# EAGLE board Large_G2iM+_kit (EAGLE 5.06)
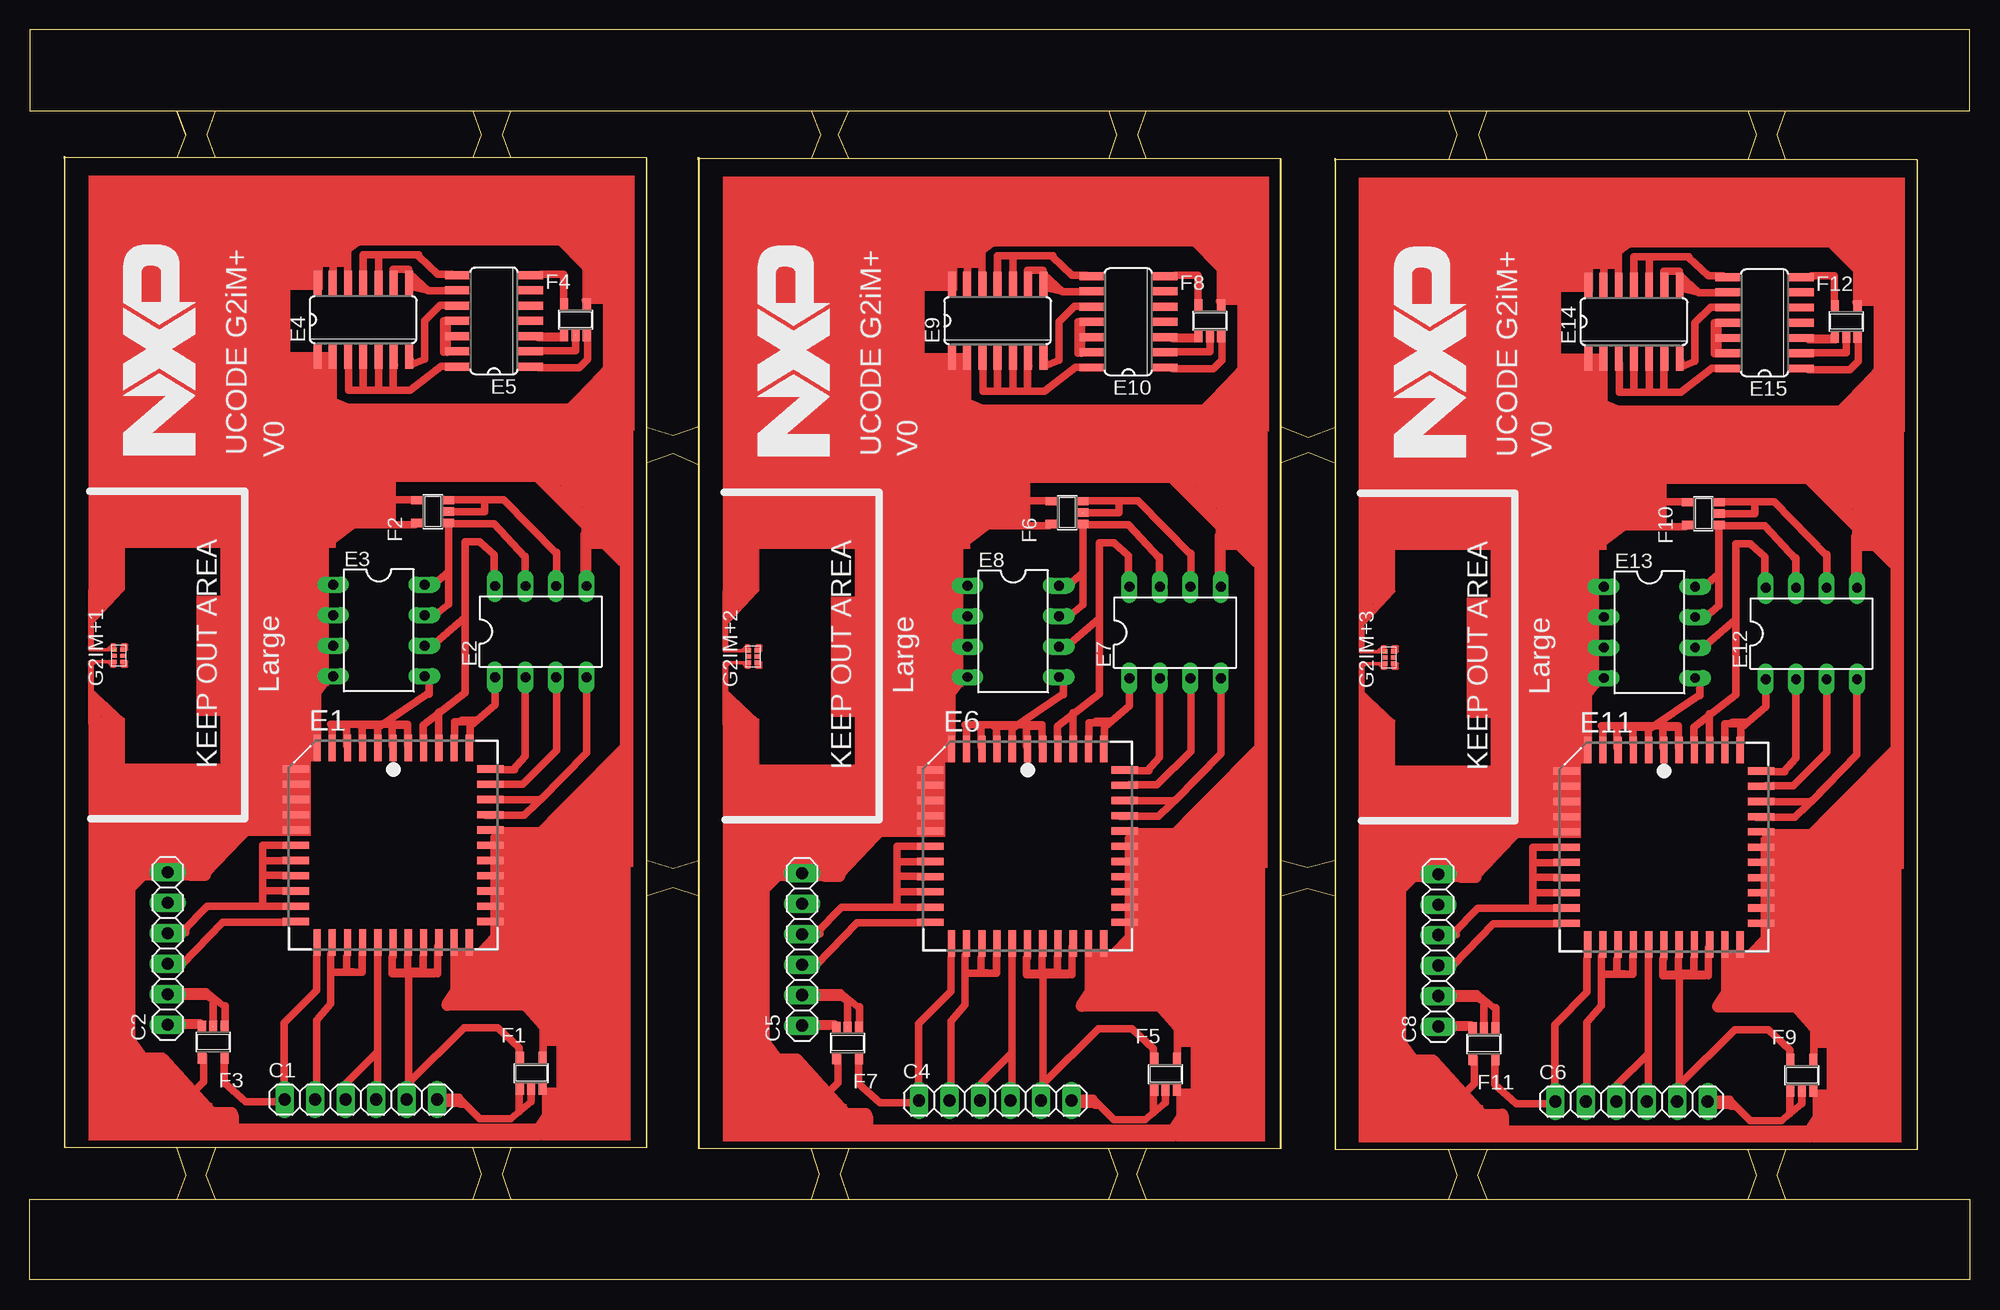
[diagram p0: board, top side]
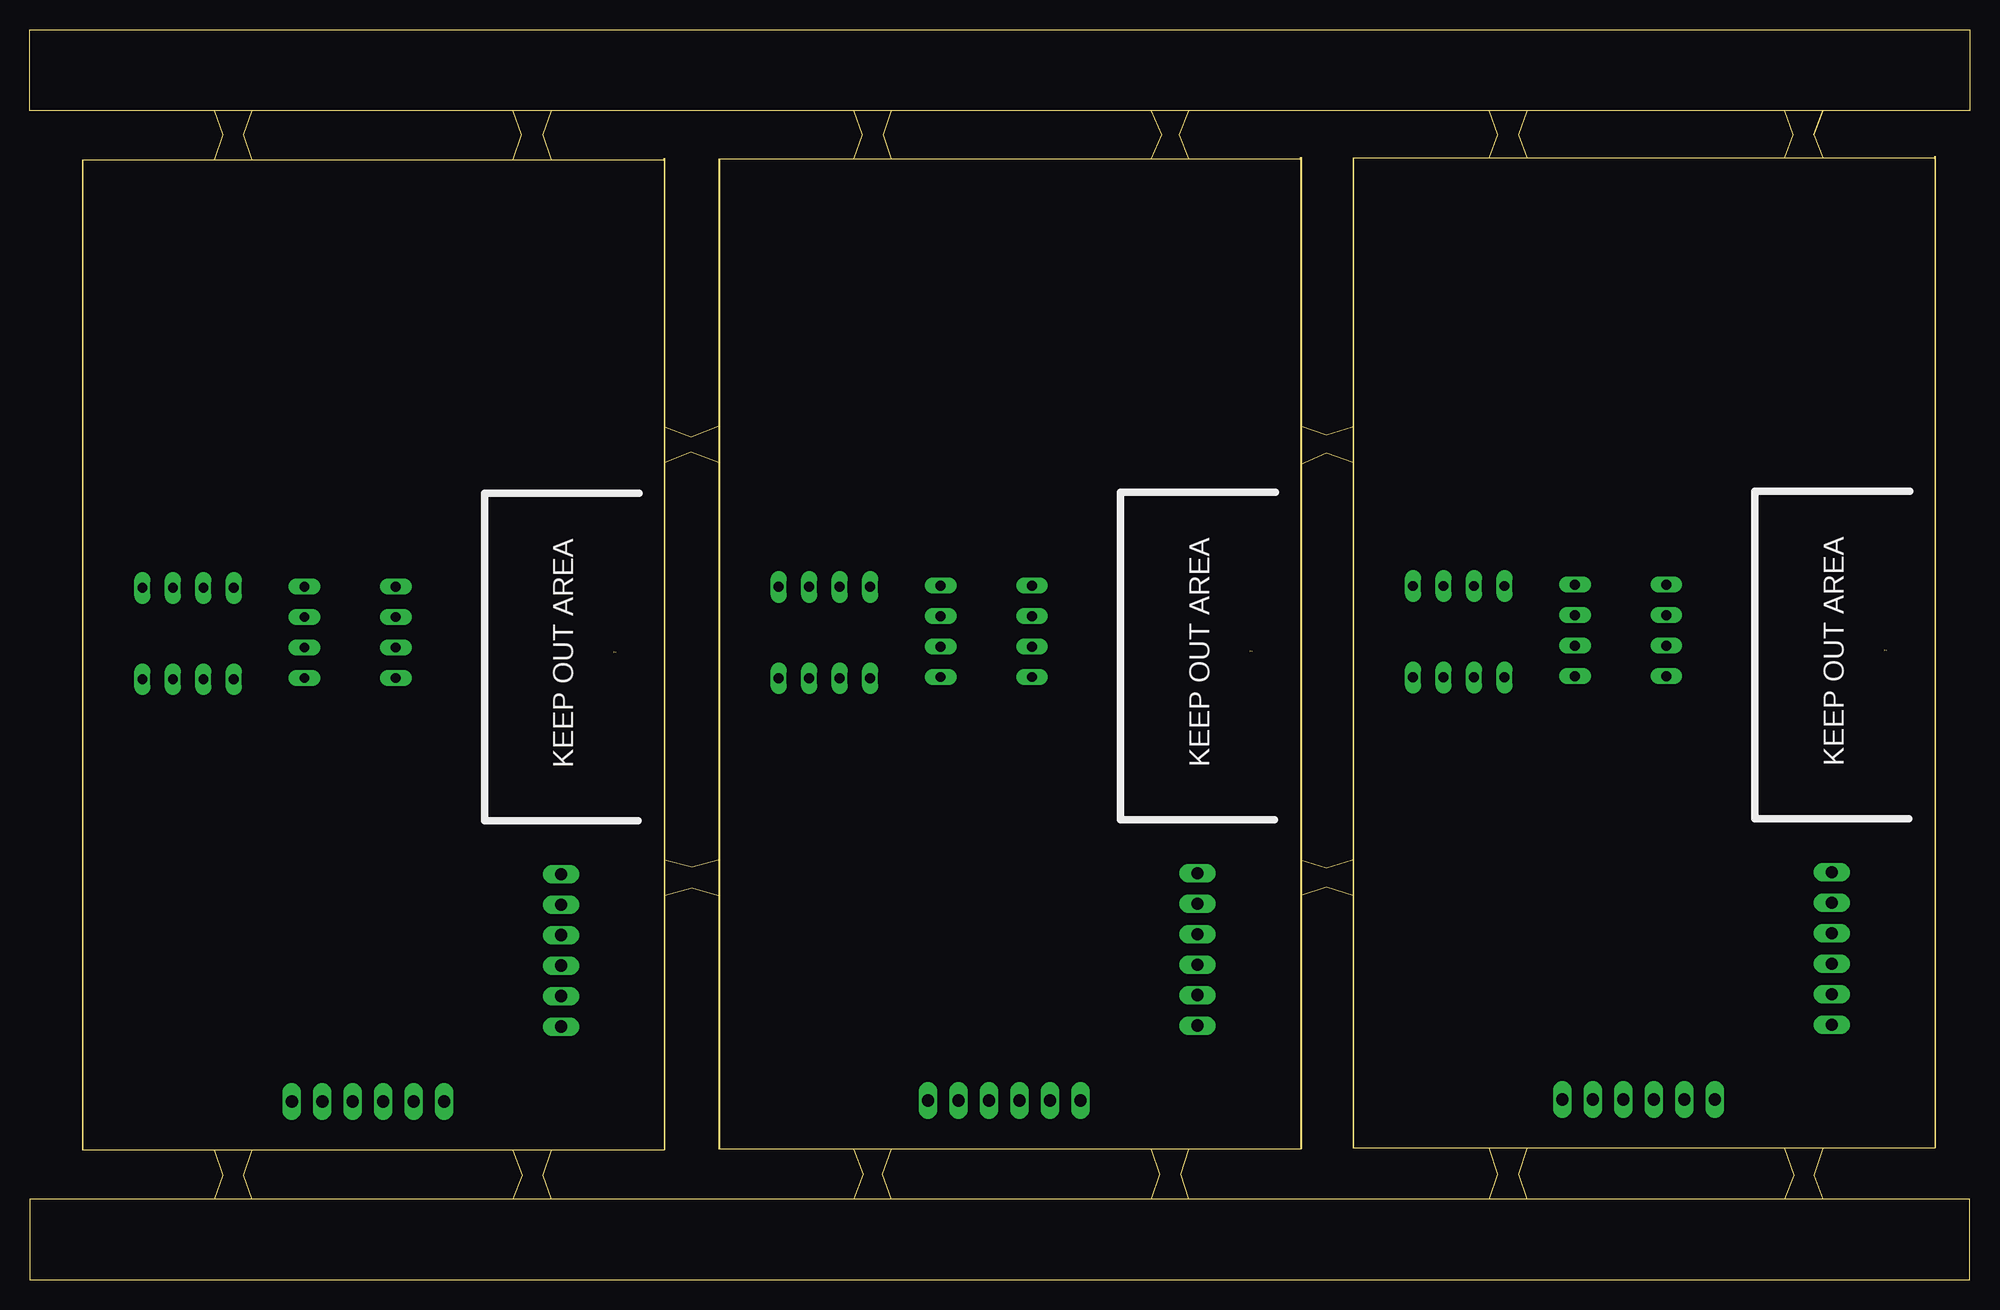
[diagram p1: board, bottom side, seen from below]

Size 161.68 x 104.16 mm. Coordinates in mm from the lower left corner, seen from the top.
Outline: 156 segments
Copper layers (1*16): Top 0.035mm / dielectric 1.5mm / Bottom 0.035mm
Design rules "default *": minimum track width 10mil, minimum drill 24mil, track to track 0mil, track to pad 0mil, pad to pad 0mil, via to via 8mil, smd to smd 0mil, copper to edge 40mil, drill to drill 8mil, minimum pad ring 10mil, minimum via ring 8mil, stop-mask expansion 0mil, vias tented up to drill 0mil, thermal gap 10mil

## Footprints (pad centres in the part's own frame; a part is rotated, then mirrored left to right if it is on the bottom)
1X06 = drill 1.016 long: 1 -6.35,0; 2 -3.81,0; 3 -1.27,0; 4 1.27,0; 5 3.81,0; 6 6.35,0
PLCC44 = smd 0.6 x 2.2: 1 0,8.1; 2 -1.27,8.1; 3 -2.54,8.1; 4 -3.81,8.1; 5 -5.08,8.1; 6 -6.35,8.1; 18 -6.35,-8.1; 19 -5.08,-8.1; 20 -3.81,-8.1; 21 -2.54,-8.1; 22 -1.27,-8.1; 23 0,-8.1; 24 1.27,-8.1; 25 2.54,-8.1; 26 3.81,-8.1; 27 5.08,-8.1; 28 6.35,-8.1; 40 6.35,8.1; 41 5.08,8.1; 42 3.81,8.1; 43 2.54,8.1; 44 1.27,8.1 | smd 2.2 x 0.6: 7 -8.1,6.35; 8 -8.1,5.08; 9 -8.1,3.81; 10 -8.1,2.54; 11 -8.1,1.27; 12 -8.1,0; 13 -8.1,-1.27; 14 -8.1,-2.54; 15 -8.1,-3.81; 16 -8.1,-5.08; 17 -8.1,-6.35; 29 8.1,-6.35; 30 8.1,-5.08; 31 8.1,-3.81; 32 8.1,-2.54; 33 8.1,-1.27; 34 8.1,0; 35 8.1,1.27; 36 8.1,2.54; 37 8.1,3.81; 38 8.1,5.08; 39 8.1,6.35
DIL08 = drill 0.813 long: 1 -3.81,-3.81; 2 -1.27,-3.81; 3 1.27,-3.81; 4 3.81,-3.81; 5 3.81,3.81; 6 1.27,3.81; 7 -1.27,3.81; 8 -3.81,3.81
SO14 = smd 0.66 x 2.032: 1 -3.81,-3.073; 2 -2.54,-3.073; 3 -1.27,-3.073; 4 0,-3.073; 5 1.27,-3.073; 6 2.54,-3.073; 7 3.81,-3.073; 8 3.81,3.073; 9 2.54,3.073; 10 1.27,3.073; 11 0,3.073; 12 -1.27,3.073; 13 -2.54,3.073; 14 -3.81,3.073
SOT23-5 = smd 0.69 x 0.99: 1 -0.95,-1.29; 2 0,-1.29; 3 0.95,-1.29; 4 0.95,1.3; 5 -0.95,1.3
SOT886 = smd 0.35 x 0.4: 1 0.5,0.338; 2 0,0.338; 3 -0.5,0.338; 4 -0.5,-0.338; 5 0,-0.338; 6 0.5,-0.338

## Placement (x,y rotation side)
C1  [1X06]  27.58,15.02 0 top
C2  [1X06]  11.48,27.62 90 top
C4  [1X06]  80.46,14.94 0 top
C5  [1X06]  64.36,27.54 90 top
C6  [1X06]  133.5,14.86 0 top
C8  [1X06]  117.4,27.46 90 top
E1  [PLCC44]  30.28,36.22 0 top
E2  [DIL08]  42.58,54.02 0 top
E3  [DIL08]  29.08,54.12 270 top
E4  [SO14]  27.78,80.02 0 top
E5  [SO14]  38.68,79.92 90 top
E6  [PLCC44]  83.16,36.14 0 top
E7  [DIL08]  95.46,53.94 0 top
E8  [DIL08]  81.96,54.04 270 top
E9  [SO14]  80.66,79.94 0 top
E10  [SO14]  91.56,79.84 90 top
E11  [PLCC44]  136.2,36.06 0 top
E12  [DIL08]  148.5,53.86 0 top
E13  [DIL08]  135,53.96 270 top
E14  [SO14]  133.7,79.86 0 top
E15  [SO14]  144.6,79.76 90 top
E$1  [LOGO]  13.78,68.72 90 top
E$3  [LOGO]  66.66,68.64 90 top
E$4  [LOGO]  119.7,68.56 90 top
F1  [SOT23-5]  41.78,17.22 0 top
F2  [SOT23-5]  33.58,64.02 90 top
F3  [SOT23-5]  15.28,19.82 180 top
F4  [SOT23-5]  45.48,80.02 0 top
F5  [SOT23-5]  94.66,17.14 0 top
F6  [SOT23-5]  86.46,63.94 90 top
F7  [SOT23-5]  68.16,19.74 180 top
F8  [SOT23-5]  98.36,79.94 0 top
F9  [SOT23-5]  147.7,17.06 0 top
F10  [SOT23-5]  139.5,63.86 90 top
F11  [SOT23-5]  121.2,19.66 180 top
F12  [SOT23-5]  151.4,79.86 0 top
G2IM+1  [SOT886]  7.38,52.02 90 top
G2IM+2  [SOT886]  60.26,51.94 90 top
G2IM+3  [SOT886]  113.3,51.86 90 top

## Library data of the parts
C1 C2 C4-C6 C8 = pinhead
E1 E6 E11 = altera
E2 E3 E7 E8 E12 E13 = ic-package
E4 E5 E9 E10 E14 E15 = 74xx-eu
E$1 E$3 E$4 G2IM+1-G2IM+3 = NXP_1
F1-F12 = 74xx-little-us

## Tracks (layer width: path | path; a pad name or v marks a point on that pad's centre or on a via)
S$107
  Top 1.422: 12.28,73.72 12.18,73.72
S$108
  Top 1.422: 21.88,83.82 12.18,74.32 16.28,76.92 17.08,74.92
S$109
  Top 1.422: 17.78,79.42 17.88,79.42 17.88,74.12 16.88,74.12 16.88,78.22 16.28,78.22 16.28,74.32 15.18,74.32 15.18,75.42 14.28,75.42 14.28,74.32
S$110
  Top 1.27: 13.18,71.72 13.78,71.72 13.78,72.12
S$114
  Top 0.61: 41.38,50.12 41.28,50.12 41.28,43.82
S$117
  Top 0.61: 46.48,58.42 46.48,63.42 | 46.48,63.42 46.48,63.62 | 46.48,63.42 46.48,68.92
S$124
  Top 0.61: 46.18,62.12 46.18,58.12
S$125
  Top 0.61: 43.88,49.92 43.88,44.22
S$126
  Top 0.61: 46.38,49.92 46.38,43.92
S$127
  Top 0.61: 42.78,18.52 42.78,24.62
S$170
  Top 0.61: 42.78,15.72 47.98,15.72 47.98,15.82
S$171
  Top 0.61: 48.68,37.12 48.98,37.12 | 48.98,37.12 49.48,37.12 | 48.98,37.12 48.98,35.52
  Top 1.27: 48.68,37.12 48.88,37.12 48.88,42.42 48.18,42.42 48.18,37.02 47.68,37.02 47.68,40.72 46.88,40.72 46.88,37.32 45.98,37.32 45.98,39.52 45.48,39.52 45.48,37.32 44.48,37.32 44.48,38.02
S$172
  Top 0.61: 43.68,29.52 43.68,29.62
S$173
  Top 0.61: 41.68,30.82 44.18,30.82
  Top 1.27: 36.48,25.82 42.78,32.62 42.78,25.32 41.68,25.32 41.68,30.82
S$174
  Top 0.61: 43.88,31.92 43.88,32.12
S$175
  Top 0.61: 43.48,33.12 43.48,33.22
S$176
  Top 0.61: 43.48,34.42 43.48,34.52
S$177
  Top 0.61: 41.78,15.82 41.78,14.82 40.08,13.42
S$178
  Top 0.61: 40.78,15.62 40.78,14.02
S$179
  Top 0.61: 31.48,15.02 31.48,16.12 31.58,16.12 31.58,25.72 | 31.48,27.02 31.48,25.72 31.58,25.72 | 31.58,25.72 32.78,25.72 32.78,27.02
S$180
  Top 0.61: 31.58,16.42 36.18,21.02
S$181
  Top 0.61: 40.78,18.52 40.78,19.22
S$182
  Top 0.61: 40.78,19.32 38.98,21.02 36.18,21.02
S$183
  Top 0.61: 28.88,15.02 28.98,15.02 28.98,28.32
S$184
  Top 0.61: 34.98,65.02 37.88,65.02 | 37.88,65.02 39.48,65.02 43.88,60.52 | 34.88,64.02 37.88,64.02 37.88,65.02
S$185
  Top 0.61: 43.88,60.62 43.88,58.82
S$186
  Top 0.61: 34.88,63.02 38.68,63.02 41.28,60.22
S$187
  Top 0.61: 41.18,60.32 41.28,60.32 41.28,58.52
S$188
  Top 0.61: 26.38,15.02 26.38,16.42 28.98,19.02 28.98,17.72
S$189
  Top 0.61: 26.38,26.92 26.38,25.62 25.08,25.62 25.08,25.72 | 25.08,25.72 25.08,27.12 | 25.08,25.72 25.08,23.02 23.88,21.62
S$190
  Top 0.61: 32.28,65.02 29.88,65.02 27.68,66.62
S$191
  Top 0.61: 27.58,66.72 27.58,69.92
S$192
  Top 0.61: 30.28,26.92 30.18,26.92 30.18,25.52
S$193
  Top 0.61: 30.18,25.72 30.18,25.62 33.98,25.52 33.98,27.82
S$194
  Top 0.61: 16.78,42.32 17.18,42.32 17.18,40.92 | 16.78,42.32 15.08,42.32 15.08,42.22 | 17.18,40.92 17.18,41.12 | 17.18,40.92 17.18,39.72 | 16.78,42.32 16.78,39.72 16.38,39.72 | 16.38,39.72 15.88,39.72 | 16.38,39.72 16.38,42.12
S$195
  Top 0.61: 15.08,38.42 15.08,38.52
S$196
  Top 0.61: 15.38,37.12 15.38,37.22
S$197
  Top 0.61: 9.98,34.12 10.88,34.12 11.78,34.62
S$198
  Top 0.61: 16.18,18.32 16.18,16.42
S$199
  Top 0.61: 16.18,16.42 17.98,14.82
S$200
  Top 0.61: 21.38,14.82 17.98,14.82
S$201
  Top 0.61: 14.38,18.72 14.48,18.72 14.48,16.52 12.78,14.82 5.98,14.82 5.98,14.92
S$202
  Top 0.61: 8.18,21.32 6.08,21.32
S$203
  Top 0.61: 12.28,26.32 12.68,26.32 16.08,29.82 16.48,29.82 21.38,29.82
S$204
  Top 0.61: 14.18,21.42 12.38,21.42
S$205
  Top 0.61: 16.28,22.72 16.28,21.42 | 16.28,22.72 16.28,22.82 | 14.68,24.02 16.28,22.72
S$206
  Top 0.61: 15.28,21.32 15.28,23.12
S$207
  Top 0.61: 21.38,31.12 14.78,31.12 12.68,29.02
S$208
  Top 0.61: 12.28,28.92 12.98,28.92
S$209
  Top 0.61: 25.28,61.62 26.98,62.92 32.08,62.92 32.08,63.12
S$210
  Top 0.61: 20.28,61.42 22.78,61.42 22.78,62.82 | 20.28,61.42 17.68,61.42 17.68,62.82 17.58,62.82 | 20.28,61.42 20.28,63.92
S$211
  Top 0.61: 38.68,58.82 38.68,60.42 37.58,61.42
S$212
  Top 0.61: 31.48,25.62 30.28,25.62
S$213
  Top 0.61: 33.78,25.62 31.58,25.62 31.58,25.52 | 31.58,25.52 30.38,25.52 | 31.58,25.52 33.68,25.52
S$214
  Top 0.61: 32.78,44.92 32.78,46.22 36.28,48.92 36.28,60.22
S$215
  Top 0.61: 31.48,46.12 31.48,46.22 30.18,46.22 30.18,44.52 | 31.48,46.12 31.48,44.52 | 25.08,46.32 31.48,46.32 31.48,46.12
S$216
  Top 1.27: 41.58,36.02 49.68,44.22
S$217
  Top 1.27: 38.68,23.22 36.48,23.22 36.48,25.82 38.58,25.82 38.58,25.62 38.28,25.62 38.28,23.82 37.58,23.82 37.58,24.82
S$218
  Top 1.27: 49.48,60.02 39.78,69.72 39.78,69.62 39.98,69.62
S$219
  Top 1.27: 45.38,69.52 45.78,69.52 45.78,65.02 44.98,65.02 44.98,66.12 44.88,66.12 44.88,68.82 42.68,68.82 42.68,68.42 44.08,68.42 44.08,67.42 44.18,67.42 44.18,66.82 43.48,66.82 43.48,67.52
S$220
  Top 1.27: 42.58,69.52 42.48,69.52 42.48,67.42 42.18,67.42 42.18,68.92
S$221
  Top 1.27: 15.88,62.92 15.68,62.92
S$222
  Top 1.27: 40.38,26.72 37.78,26.72 37.78,26.52
S$223
  Top 1.27: 14.58,14.02 9.78,14.02 9.78,14.12 14.98,13.92 10.98,18.32
S$224
  Top 1.27: 11.88,15.72 12.88,15.72 12.88,14.12
S$225
  Top 0.61: 10.18,62.52 14.28,62.52 14.28,61.82
S$226
  Top 0.61: 13.08,29.32 12.28,28.92
S$227
  Top 0.61: 12.28,26.32 12.88,26.62
S$228
  Top 0.61: 12.48,23.62 14.98,23.62 14.98,23.52
S$229
  Top 0.61: 12.28,21.22 13.78,21.22
S$230
  Top 0.61: 6.08,21.02 8.18,21.02 8.18,21.52 6.38,21.52
S$231
  Top 0.61: 20.98,15.12 21.18,15.12 21.18,16.22
S$232
  Top 0.61: 22.58,61.82 18.08,61.82
S$233
  Top 0.61: 22.48,62.32 17.98,62.32
S$234
  Top 0.61: 17.98,62.42 14.38,62.42 14.38,62.32
S$235
  Top 0.61: 22.68,62.42 25.98,62.42 25.98,62.32
S$236
  Top 1.016: 40.68,23.62 43.68,20.22 45.98,19.72
S$237
  Top 1.016: 46.88,22.42 42.48,22.42 42.48,22.52
S$238
  Top 1.016: 20.18,85.02 20.18,87.02 21.48,87.02 18.88,83.52 | 18.88,83.52 18.88,80.82 | 18.88,83.52 12.08,76.72 12.08,77.82 18.88,77.82
S$239
  Top 1.016: 19.48,84.12 19.58,84.12 19.58,82.62 20.28,82.62 20.28,84.22
S$240
  Top 0.61: 25.28,84.02 25.28,84.72 26.48,84.72 26.48,83.82
S$241
  Top 0.61: 35.18,83.82 33.98,83.82 32.38,85.32
S$242
  Top 0.61: 32.38,85.42 27.78,85.42 27.78,83.82
S$243
  Top 0.61: 29.08,85.32 29.08,83.32
S$244
  Top 0.61: 35.28,82.42 33.38,82.42 | 33.38,82.42 33.18,82.42 31.58,83.92 31.58,82.82 33.38,82.42
S$245
  Top 0.61: 31.98,83.32 32.08,83.32 32.08,82.92
S$246
  Top 0.61: 31.58,84.02 31.58,84.22 30.28,84.22 30.28,83.92
S$247
  Top 0.61: 44.58,81.62 44.48,81.62 44.48,83.82 42.58,83.82 42.58,83.72
S$248
  Top 0.61: 46.28,81.62 47.88,81.62
S$249
  Top 0.61: 44.58,78.52 42.38,78.52 42.38,78.62 44.28,78.62
S$250
  Top 0.61: 42.38,77.42 45.48,77.42 45.48,78.82
S$251
  Top 0.61: 42.38,76.02 45.78,76.02 46.48,76.72 46.48,78.62
S$252
  Top 0.61: 35.18,81.22 34.18,81.22 32.88,79.92 32.88,76.92
S$253
  Top 0.61: 32.88,76.72 31.68,76.22 31.68,76.72
S$254
  Top 0.61: 34.78,79.92 34.78,77.32
S$255
  Top 0.61: 34.48,79.92 34.48,77.32
S$256
  Top 0.61: 34.98,76.12 34.28,76.12 31.68,74.12 30.28,74.12 | 30.28,74.12 26.58,74.12 26.58,76.52 | 30.38,76.22 30.28,76.22 30.28,74.12
S$257
  Top 0.61: 27.78,76.32 27.78,74.42
S$258
  Top 0.61: 29.08,76.22 29.08,74.22
S$259
  Top 1.016: 44.48,71.92 46.98,74.52 48.98,76.62
S$260
  Top 1.016: 47.68,72.42 47.68,74.32 47.18,74.32 47.18,72.42 46.58,72.42 46.58,73.02
S$261
  Top 1.016: 48.28,78.22 48.28,82.62 42.38,88.62
S$262
  Top 1.016: 45.88,86.72 45.88,85.62
S$263
  Top 1.016: 25.78,85.52 25.68,85.52 27.18,86.62 29.18,87.02
S$264
  Top 1.016: 23.98,74.52 24.08,74.52 24.08,71.42 22.88,71.42 22.88,74.02 29.28,71.42
S$265
  Top 0.61: 23.78,14.92 23.88,14.92 23.88,21.52
S$266
  Top 0.61: 27.68,25.62 27.68,27.22 | 27.68,25.62 26.38,25.72 | 26.48,25.62 27.68,25.62
S$267
  Top 0.61: 23.88,25.32 23.88,26.92 | 23.88,25.32 23.88,24.82 | 23.88,24.22 23.88,25.32
S$268
  Top 0.61: 21.28,21.52 23.88,24.12
S$269
  Top 0.61: 40.08,13.42 37.48,13.42 35.78,15.12
S$270
  Top 0.61: 35.78,15.22 33.98,15.22 33.98,14.72 35.58,14.72 35.58,14.82 35.88,14.82 35.88,14.62 36.08,14.62
S$271
  Top 0.61: 20.78,86.62 20.98,86.62 20.98,83.42 18.68,83.42 18.68,80.92 18.28,80.92 18.28,82.02 17.98,82.02 17.98,80.82 17.58,80.82 17.58,81.32 17.28,81.32 17.28,79.92 16.88,79.92 16.88,80.72 16.48,80.72 16.48,78.92 16.18,78.92 | 15.28,78.92 16.18,78.92 | 16.18,78.92 16.18,79.72 15.68,79.72 15.68,79.22
S$272
  Top 0.254: 15.28,79.42 15.38,79.42 15.38,79.02
S$273
  Top 0.254: 16.18,80.22 16.18,79.92
S$274
  Top 0.254: 5.98,48.22 5.98,47.62 5.78,47.62 5.78,46.82 | 5.18,49.02 5.18,46.82 5.38,46.82 5.38,48.82 5.58,48.72 5.58,46.82 5.78,46.82 | 5.78,46.82 5.78,48.42 5.88,48.22 5.98,47.02 7.28,47.02 | 7.38,47.02 7.28,47.02 | 7.28,47.02 6.18,47.12 6.18,48.12 6.38,48.02 6.38,47.22 6.58,47.22 | 7.18,47.22 6.68,47.22 | 6.68,47.22 6.58,47.22 | 6.58,47.22 6.58,47.72 | 6.68,47.62 6.68,47.22 | 6.68,47.22 6.98,47.22 6.98,47.42 6.78,47.42 6.78,47.52 | 5.78,46.82 7.48,46.82
S$275
  Top 0.254: 5.18,57.32 5.08,57.32 5.08,54.82 5.28,55.02 5.28,57.22 7.28,57.22 | 7.48,57.22 7.28,57.22 | 7.28,57.22 7.28,57.02 5.48,57.02 5.48,55.22 5.68,55.42 5.68,56.82 6.88,56.82 | 7.08,56.82 6.88,56.82 | 6.88,56.82 6.88,56.62 5.88,56.62 5.88,55.62 6.08,56.02 6.08,56.42 6.28,56.42 | 6.68,56.42 6.28,56.42 | 6.28,56.42 6.28,56.02 6.48,56.52
S$276
  Top 0.61: 34.08,44.82 34.08,47.32
S$277
  Top 0.61: 37.48,61.52 36.28,61.52 36.28,60.32
S$278
  Top 0.61: 35.38,45.22 35.38,46.52 36.68,46.52 36.68,45.02
S$279
  Top 0.61: 38.78,49.62 38.78,47.92 36.68,46.12
S$280
  Top 0.61: 23.88,44.92 23.98,44.92 23.98,48.92 | 23.98,48.92 23.98,53.12 23.68,53.12 23.68,45.42 | 23.98,48.92 24.58,49.72
S$281
  Top 0.61: 21.18,16.32 21.18,21.42
S$282
  Top 0.61: 34.88,59.12 34.88,59.02 33.28,57.62 | 34.88,59.12 34.88,63.12 | 34.88,59.12 34.88,56.32 33.28,55.02
S$283
  Top 0.61: 21.78,36.22 19.38,36.22 19.38,31.22
S$284
  Top 0.61: 19.58,32.42 21.48,32.42
S$285
  Top 0.61: 19.68,33.72 21.38,33.72
S$286
  Top 0.61: 19.48,34.92 21.48,34.92
S$287
  Top 0.61: 40.28,42.52 39.18,42.52 | 40.28,42.52 40.38,42.52 | 40.28,42.52 41.28,43.62
S$288
  Top 0.61: 38.78,41.32 41.08,41.32 43.88,44.12
S$289
  Top 0.61: 38.58,40.02 42.58,40.02 46.38,43.92
S$290
  Top 0.61: 14.58,24.02 12.38,24.02 12.38,23.92
S$291
  Top 0.61: 37.98,38.72 41.08,38.72
S$292
  Top 0.61: 41.18,38.72 43.28,40.72
S$293
  Top 1.016: 13.38,33.72 14.58,33.72 14.58,33.92 18.28,37.82
S$294
  Top 1.016: 14.18,34.92 14.58,34.92
S$295
  Top 1.016: 15.08,36.92 16.48,36.92
S$296
  Top 1.016: 14.28,13.92 16.78,13.92 16.78,13.72 16.88,13.72 16.88,12.62
S$297
  Top 1.016: 43.78,12.12 42.18,12.12 43.08,13.52 43.08,12.72 45.18,12.62
S$298
  Top 1.016: 41.88,22.92 34.78,22.92 36.78,26.02 36.78,24.02 37.38,23.92
S$299
  Top 0.61: 33.28,48.92 33.28,50.22 | 28.98,46.02 28.98,44.82 | 28.98,46.02 28.98,46.22 27.48,46.22 27.48,46.32 | 27.68,44.82 27.68,46.32 27.48,46.32 | 26.38,46.32 27.48,46.32 | 26.38,46.32 25.18,46.32 25.18,44.32 | 26.38,46.32 26.38,44.52 | 33.28,48.92 33.28,48.82 | 28.98,46.02 33.28,48.92
S$300
  Top 0.61: 33.28,52.62 36.28,55.22
S$301
  Top 0.61: 24.08,52.02 24.58,52.92 24.28,52.22
S$302
  Top 0.61: 23.68,53.22 24.58,53.22 24.58,53.12
S$303
  Top 0.61: 35.98,46.62 37.08,46.62
S$304
  Top 0.61: 7.88,32.02 9.88,34.02
S$305
  Top 0.61: 9.58,18.52 7.98,20.72
S$306
  Top 0.61: 8.78,18.32 8.88,18.32 8.88,19.32
S$307
  Top 0.305: 24.78,55.42 24.68,55.42 24.68,58.22 24.48,58.22 | 24.48,58.22 24.48,55.42 24.18,55.42 24.18,58.22 24.48,58.22
S$308
  Top 0.254: 4.98,57.52 4.98,55.32 4.98,54.52 | 4.98,54.52 7.78,57.52 | 4.98,52.52 4.98,54.52 | 5.38,52.52 5.08,52.92
  Top 0.305: 6.98,52.52 6.28,52.52 5.38,52.52 4.98,52.52 4.98,55.32
S$309
  Top 0.254: 5.38,51.42 4.98,51.12
S$310
  Top 0.254: 5.18,54.62 5.18,52.82
S$311
  Top 0.254: 5.18,51.22 5.18,49.12
S$312
  Top 0.254: 6.38,52.52 6.78,52.82 | 6.78,52.72 7.08,52.72
  Top 0.305: 6.78,52.82 6.78,52.72 6.78,52.62
S$313
  Top 0.254: 7.08,52.62 7.08,52.92 6.78,52.92
S$314
  Top 0.254: 6.48,51.52 6.78,51.22 7.08,51.22 7.08,51.32 | 4.98,49.32 4.98,51.52 | 4.98,49.32 7.78,46.72 | 4.98,49.32 4.98,49.02 4.98,46.32 | 7.08,51.32 7.08,51.42 | 6.78,51.42 6.78,51.12 7.08,51.12 7.08,51.32
  Top 0.305: 6.78,51.52 6.98,51.52 | 6.78,51.52 6.78,51.42 6.78,51.22 | 6.78,51.52 6.88,51.52 | 6.78,51.52 6.48,51.52 6.38,51.52 4.98,51.52 4.98,49.02
S$315
  Top 0.254: 7.78,52.92 7.88,52.92 7.88,52.72
S$316
  Top 0.254: 7.68,52.52 7.68,52.92 8.08,52.92 8.08,52.52 7.68,52.52
  Top 0.305: 7.68,52.52 7.88,52.52
S$317
  Top 0.254: 7.68,51.42 7.68,51.22
  Top 0.305: 7.68,51.42 7.88,51.42
S$318
  Top 0.254: 7.68,51.52 7.68,51.12 8.08,51.12 8.08,51.52 7.88,51.52 7.88,51.32
S$319
  Top 1.422: 65.16,73.64 65.06,73.64
S$320
  Top 1.422: 74.76,83.74 65.06,74.24 69.16,76.84 69.96,74.84
S$321
  Top 1.422: 70.66,79.34 70.76,79.34 70.76,74.04 69.76,74.04 69.76,78.14 69.16,78.14 69.16,74.24 68.06,74.24 68.06,75.34 67.16,75.34 67.16,74.24
S$322
  Top 1.27: 66.06,71.64 66.66,71.64 66.66,72.04
S$323
  Top 0.61: 94.26,50.04 94.16,50.04 94.16,43.74
S$324
  Top 0.61: 99.36,58.34 99.36,63.34 | 99.36,63.34 99.36,63.54 | 99.36,63.34 99.36,68.84
S$325
  Top 0.61: 99.06,62.04 99.06,58.04
S$326
  Top 0.61: 96.76,49.84 96.76,44.14
S$327
  Top 0.61: 99.26,49.84 99.26,43.84
S$328
  Top 0.61: 95.66,18.44 95.66,24.54
S$329
  Top 0.61: 95.66,15.64 100.86,15.64 100.86,15.74
S$330
  Top 0.61: 101.56,37.04 101.86,37.04 | 101.86,37.04 102.36,37.04 | 101.86,37.04 101.86,35.44
  Top 1.27: 101.56,37.04 101.76,37.04 101.76,42.34 101.06,42.34 101.06,36.94 100.56,36.94 100.56,40.64 99.76,40.64 99.76,37.24 98.86,37.24 98.86,39.44 98.36,39.44 98.36,37.24 97.36,37.24 97.36,37.94
S$331
  Top 0.61: 96.56,29.44 96.56,29.54
S$332
  Top 0.61: 94.56,30.74 97.06,30.74
  Top 1.27: 89.36,25.74 95.66,32.54 95.66,25.24 94.56,25.24 94.56,30.74
S$333
  Top 0.61: 96.76,31.84 96.76,32.04
S$334
  Top 0.61: 96.36,33.04 96.36,33.14
S$335
  Top 0.61: 96.36,34.34 96.36,34.44
S$336
  Top 0.61: 94.66,15.74 94.66,14.74 92.96,13.34
S$337
  Top 0.61: 93.66,15.54 93.66,13.94
S$338
  Top 0.61: 84.36,14.94 84.36,16.04 84.46,16.04 84.46,25.64 | 84.36,26.94 84.36,25.64 84.46,25.64 | 84.46,25.64 85.66,25.64 85.66,26.94
S$339
  Top 0.61: 84.46,16.34 89.06,20.94
S$340
  Top 0.61: 93.66,18.44 93.66,19.14
S$341
  Top 0.61: 93.66,19.24 91.86,20.94 89.06,20.94
S$342
  Top 0.61: 81.76,14.94 81.86,14.94 81.86,28.24
S$343
  Top 0.61: 87.86,64.94 90.76,64.94 | 90.76,64.94 92.36,64.94 96.76,60.44 | 87.76,63.94 90.76,63.94 90.76,64.94
S$344
  Top 0.61: 96.76,60.54 96.76,58.74
S$345
  Top 0.61: 87.76,62.94 91.56,62.94 94.16,60.14
S$346
  Top 0.61: 94.06,60.24 94.16,60.24 94.16,58.44
S$347
  Top 0.61: 79.26,14.94 79.26,16.34 81.86,18.94 81.86,17.64
S$348
  Top 0.61: 79.26,26.84 79.26,25.54 77.96,25.54 77.96,25.64 | 77.96,25.64 77.96,27.04 | 77.96,25.64 77.96,22.94 76.76,21.54
S$349
  Top 0.61: 85.16,64.94 82.76,64.94 80.56,66.54
S$350
  Top 0.61: 80.46,66.64 80.46,69.84
S$351
  Top 0.61: 83.16,26.84 83.06,26.84 83.06,25.44
S$352
  Top 0.61: 83.06,25.64 83.06,25.54 86.86,25.44 86.86,27.74
S$353
  Top 0.61: 69.66,42.24 70.06,42.24 70.06,40.84 | 69.66,42.24 67.96,42.24 67.96,42.14 | 70.06,40.84 70.06,41.04 | 70.06,40.84 70.06,39.64 | 69.66,42.24 69.66,39.64 69.26,39.64 | 69.26,39.64 68.76,39.64 | 69.26,39.64 69.26,42.04
S$354
  Top 0.61: 67.96,38.34 67.96,38.44
S$355
  Top 0.61: 68.26,37.04 68.26,37.14
S$356
  Top 0.61: 62.86,34.04 63.76,34.04 64.66,34.54
S$357
  Top 0.61: 69.06,18.24 69.06,16.34
S$358
  Top 0.61: 69.06,16.34 70.86,14.74
S$359
  Top 0.61: 74.26,14.74 70.86,14.74
S$360
  Top 0.61: 67.26,18.64 67.36,18.64 67.36,16.44 65.66,14.74 58.86,14.74 58.86,14.84
S$361
  Top 0.61: 61.06,21.24 58.96,21.24
S$362
  Top 0.61: 65.16,26.24 65.56,26.24 68.96,29.74 69.36,29.74 74.26,29.74
S$363
  Top 0.61: 67.06,21.34 65.26,21.34
S$364
  Top 0.61: 69.16,22.64 69.16,21.34 | 69.16,22.64 69.16,22.74 | 67.56,23.94 69.16,22.64
S$365
  Top 0.61: 68.16,21.24 68.16,23.04
S$366
  Top 0.61: 74.26,31.04 67.66,31.04 65.56,28.94
S$367
  Top 0.61: 65.16,28.84 65.86,28.84
S$368
  Top 0.61: 78.16,61.54 79.86,62.84 84.96,62.84 84.96,63.04
S$369
  Top 0.61: 73.16,61.34 75.66,61.34 75.66,62.74 | 73.16,61.34 70.56,61.34 70.56,62.74 70.46,62.74 | 73.16,61.34 73.16,63.84
S$370
  Top 0.61: 91.56,58.74 91.56,60.34 90.46,61.34
S$371
  Top 0.61: 84.36,25.54 83.16,25.54
S$372
  Top 0.61: 86.66,25.54 84.46,25.54 84.46,25.44 | 84.46,25.44 83.26,25.44 | 84.46,25.44 86.56,25.44
S$373
  Top 0.61: 85.66,44.84 85.66,46.14 89.16,48.84 89.16,60.14
S$374
  Top 0.61: 84.36,46.04 84.36,46.14 83.06,46.14 83.06,44.44 | 84.36,46.04 84.36,44.44 | 77.96,46.24 84.36,46.24 84.36,46.04
S$375
  Top 1.27: 94.46,35.94 102.56,44.14
S$376
  Top 1.27: 91.56,23.14 89.36,23.14 89.36,25.74 91.46,25.74 91.46,25.54 91.16,25.54 91.16,23.74 90.46,23.74 90.46,24.74
S$377
  Top 1.27: 102.36,59.94 92.66,69.64 92.66,69.54 92.86,69.54
S$378
  Top 1.27: 98.26,69.44 98.66,69.44 98.66,64.94 97.86,64.94 97.86,66.04 97.76,66.04 97.76,68.74 95.56,68.74 95.56,68.34 96.96,68.34 96.96,67.34 97.06,67.34 97.06,66.74 96.36,66.74 96.36,67.44
S$379
  Top 1.27: 95.46,69.44 95.36,69.44 95.36,67.34 95.06,67.34 95.06,68.84
S$380
  Top 1.27: 68.76,62.84 68.56,62.84
S$381
  Top 1.27: 93.26,26.64 90.66,26.64 90.66,26.44
S$382
  Top 1.27: 67.46,13.94 62.66,13.94 62.66,14.04 67.86,13.84 63.86,18.24
S$383
  Top 1.27: 64.76,15.64 65.76,15.64 65.76,14.04
S$384
  Top 0.61: 63.06,62.44 67.16,62.44 67.16,61.74
S$385
  Top 0.61: 65.96,29.24 65.16,28.84
S$386
  Top 0.61: 65.16,26.24 65.76,26.54
S$387
  Top 0.61: 65.36,23.54 67.86,23.54 67.86,23.44
S$388
  Top 0.61: 65.16,21.14 66.66,21.14
S$389
  Top 0.61: 58.96,20.94 61.06,20.94 61.06,21.44 59.26,21.44
S$390
  Top 0.61: 73.86,15.04 74.06,15.04 74.06,16.14
S$391
  Top 0.61: 75.46,61.74 70.96,61.74
S$392
  Top 0.61: 75.36,62.24 70.86,62.24
S$393
  Top 0.61: 70.86,62.34 67.26,62.34 67.26,62.24
S$394
  Top 0.61: 75.56,62.34 78.86,62.34 78.86,62.24
S$395
  Top 1.016: 93.56,23.54 96.56,20.14 98.86,19.64
S$396
  Top 1.016: 99.76,22.34 95.36,22.34 95.36,22.44
S$397
  Top 1.016: 73.06,84.94 73.06,86.94 74.36,86.94 71.76,83.44 | 71.76,83.44 71.76,80.74 | 71.76,83.44 64.96,76.64 64.96,77.74 71.76,77.74
S$398
  Top 1.016: 72.36,84.04 72.46,84.04 72.46,82.54 73.16,82.54 73.16,84.14
S$399
  Top 0.61: 78.16,83.94 78.16,84.64 79.36,84.64 79.36,83.74
S$400
  Top 0.61: 88.06,83.74 86.86,83.74 85.26,85.24
S$401
  Top 0.61: 85.26,85.34 80.66,85.34 80.66,83.74
S$402
  Top 0.61: 81.96,85.24 81.96,83.24
S$403
  Top 0.61: 88.16,82.34 86.26,82.34 | 86.26,82.34 86.06,82.34 84.46,83.84 84.46,82.74 86.26,82.34
S$404
  Top 0.61: 84.86,83.24 84.96,83.24 84.96,82.84
S$405
  Top 0.61: 84.46,83.94 84.46,84.14 83.16,84.14 83.16,83.84
S$406
  Top 0.61: 97.46,81.54 97.36,81.54 97.36,83.74 95.46,83.74 95.46,83.64
S$407
  Top 0.61: 99.16,81.54 100.76,81.54
S$408
  Top 0.61: 97.46,78.44 95.26,78.44 95.26,78.54 97.16,78.54
S$409
  Top 0.61: 95.26,77.34 98.36,77.34 98.36,78.74
S$410
  Top 0.61: 95.26,75.94 98.66,75.94 99.36,76.64 99.36,78.54
S$411
  Top 0.61: 88.06,81.14 87.06,81.14 85.76,79.84 85.76,76.84
S$412
  Top 0.61: 85.76,76.64 84.56,76.14 84.56,76.64
S$413
  Top 0.61: 87.66,79.84 87.66,77.24
S$414
  Top 0.61: 87.36,79.84 87.36,77.24
S$415
  Top 0.61: 87.86,76.04 87.16,76.04 84.56,74.04 83.16,74.04 | 83.16,74.04 79.46,74.04 79.46,76.44 | 83.26,76.14 83.16,76.14 83.16,74.04
S$416
  Top 0.61: 80.66,76.24 80.66,74.34
S$417
  Top 0.61: 81.96,76.14 81.96,74.14
S$418
  Top 1.016: 97.36,71.84 99.86,74.44 101.86,76.54
S$419
  Top 1.016: 100.56,72.34 100.56,74.24 100.06,74.24 100.06,72.34 99.46,72.34 99.46,72.94
S$420
  Top 1.016: 101.16,78.14 101.16,82.54 95.26,88.54
S$421
  Top 1.016: 98.76,86.64 98.76,85.54
S$422
  Top 1.016: 78.66,85.44 78.56,85.44 80.06,86.54 82.06,86.94
S$423
  Top 1.016: 76.86,74.44 76.96,74.44 76.96,71.34 75.76,71.34 75.76,73.94 82.16,71.34
S$424
  Top 0.61: 76.66,14.84 76.76,14.84 76.76,21.44
S$425
  Top 0.61: 80.56,25.54 80.56,27.14 | 80.56,25.54 79.26,25.64 | 79.36,25.54 80.56,25.54
S$426
  Top 0.61: 76.76,25.24 76.76,26.84 | 76.76,25.24 76.76,24.74 | 76.76,24.14 76.76,25.24
S$427
  Top 0.61: 74.16,21.44 76.76,24.04
S$428
  Top 0.61: 92.96,13.34 90.36,13.34 88.66,15.04
S$429
  Top 0.61: 88.66,15.14 86.86,15.14 86.86,14.64 88.46,14.64 88.46,14.74 88.76,14.74 88.76,14.54 88.96,14.54
S$430
  Top 0.61: 73.66,86.54 73.86,86.54 73.86,83.34 71.56,83.34 71.56,80.84 71.16,80.84 71.16,81.94 70.86,81.94 70.86,80.74 70.46,80.74 70.46,81.24 70.16,81.24 70.16,79.84 69.76,79.84 69.76,80.64 69.36,80.64 69.36,78.84 69.06,78.84 | 68.16,78.84 69.06,78.84 | 69.06,78.84 69.06,79.64 68.56,79.64 68.56,79.14
S$431
  Top 0.254: 68.16,79.34 68.26,79.34 68.26,78.94
S$432
  Top 0.254: 69.06,80.14 69.06,79.84
S$433
  Top 0.254: 58.86,48.14 58.86,47.54 58.66,47.54 58.66,46.74 | 58.06,48.94 58.06,46.74 58.26,46.74 58.26,48.74 58.46,48.64 58.46,46.74 58.66,46.74 | 58.66,46.74 58.66,48.34 58.76,48.14 58.86,46.94 60.16,46.94 | 60.26,46.94 60.16,46.94 | 60.16,46.94 59.06,47.04 59.06,48.04 59.26,47.94 59.26,47.14 59.46,47.14 | 60.06,47.14 59.56,47.14 | 59.56,47.14 59.46,47.14 | 59.46,47.14 59.46,47.64 | 59.56,47.54 59.56,47.14 | 59.56,47.14 59.86,47.14 59.86,47.34 59.66,47.34 59.66,47.44 | 58.66,46.74 60.36,46.74
S$434
  Top 0.254: 58.06,57.24 57.96,57.24 57.96,54.74 58.16,54.94 58.16,57.14 60.16,57.14 | 60.36,57.14 60.16,57.14 | 60.16,57.14 60.16,56.94 58.36,56.94 58.36,55.14 58.56,55.34 58.56,56.74 59.76,56.74 | 59.96,56.74 59.76,56.74 | 59.76,56.74 59.76,56.54 58.76,56.54 58.76,55.54 58.96,55.94 58.96,56.34 59.16,56.34 | 59.56,56.34 59.16,56.34 | 59.16,56.34 59.16,55.94 59.36,56.44
S$435
  Top 0.61: 86.96,44.74 86.96,47.24
S$436
  Top 0.61: 90.36,61.44 89.16,61.44 89.16,60.24
S$437
  Top 0.61: 88.26,45.14 88.26,46.44 89.56,46.44 89.56,44.94
S$438
  Top 0.61: 91.66,49.54 91.66,47.84 89.56,46.04
S$439
  Top 0.61: 76.76,44.84 76.86,44.84 76.86,48.84 | 76.86,48.84 76.86,53.04 76.56,53.04 76.56,45.34 | 76.86,48.84 77.46,49.64
S$440
  Top 0.61: 74.06,16.24 74.06,21.34
S$441
  Top 0.61: 87.76,59.04 87.76,58.94 86.16,57.54 | 87.76,59.04 87.76,63.04 | 87.76,59.04 87.76,56.24 86.16,54.94
S$442
  Top 0.61: 74.66,36.14 72.26,36.14 72.26,31.14
S$443
  Top 0.61: 72.46,32.34 74.36,32.34
S$444
  Top 0.61: 72.56,33.64 74.26,33.64
S$445
  Top 0.61: 72.36,34.84 74.36,34.84
S$446
  Top 0.61: 93.16,42.44 92.06,42.44 | 93.16,42.44 93.26,42.44 | 93.16,42.44 94.16,43.54
S$447
  Top 0.61: 91.66,41.24 93.96,41.24 96.76,44.04
S$448
  Top 0.61: 91.46,39.94 95.46,39.94 99.26,43.84
S$449
  Top 0.61: 67.46,23.94 65.26,23.94 65.26,23.84
S$450
  Top 0.61: 90.86,38.64 93.96,38.64
S$451
  Top 0.61: 94.06,38.64 96.16,40.64
S$452
  Top 1.016: 66.26,33.64 67.46,33.64 67.46,33.84 71.16,37.74
S$453
  Top 1.016: 67.06,34.84 67.46,34.84
S$454
  Top 1.016: 67.96,36.84 69.36,36.84
S$455
  Top 1.016: 67.16,13.84 69.66,13.84 69.66,13.64 69.76,13.64 69.76,12.54
S$456
  Top 1.016: 96.66,12.04 95.06,12.04 95.96,13.44 95.96,12.64 98.06,12.54
S$457
  Top 1.016: 94.76,22.84 87.66,22.84 89.66,25.94 89.66,23.94 90.26,23.84
S$458
  Top 0.61: 86.16,48.84 86.16,50.14 | 81.86,45.94 81.86,44.74 | 81.86,45.94 81.86,46.14 80.36,46.14 80.36,46.24 | 80.56,44.74 80.56,46.24 80.36,46.24 | 79.26,46.24 80.36,46.24 | 79.26,46.24 78.06,46.24 78.06,44.24 | 79.26,46.24 79.26,44.44 | 86.16,48.84 86.16,48.74 | 81.86,45.94 86.16,48.84
S$459
  Top 0.61: 86.16,52.54 89.16,55.14
S$460
  Top 0.61: 76.96,51.94 77.46,52.84 77.16,52.14
S$461
  Top 0.61: 76.56,53.14 77.46,53.14 77.46,53.04
S$462
  Top 0.61: 88.86,46.54 89.96,46.54
S$463
  Top 0.61: 60.76,31.94 62.76,33.94
S$464
  Top 0.61: 62.46,18.44 60.86,20.64
S$465
  Top 0.61: 61.66,18.24 61.76,18.24 61.76,19.24
S$466
  Top 0.305: 77.66,55.34 77.56,55.34 77.56,58.14 77.36,58.14 | 77.36,58.14 77.36,55.34 77.06,55.34 77.06,58.14 77.36,58.14
S$467
  Top 0.254: 57.86,57.44 57.86,55.24 57.86,54.44 | 57.86,54.44 60.66,57.44 | 57.86,52.44 57.86,54.44 | 58.26,52.44 57.96,52.84
  Top 0.305: 59.86,52.44 59.16,52.44 58.26,52.44 57.86,52.44 57.86,55.24
S$468
  Top 0.254: 58.26,51.34 57.86,51.04
S$469
  Top 0.254: 58.06,54.54 58.06,52.74
S$470
  Top 0.254: 58.06,51.14 58.06,49.04
S$471
  Top 0.254: 59.26,52.44 59.66,52.74 | 59.66,52.64 59.96,52.64
  Top 0.305: 59.66,52.74 59.66,52.64 59.66,52.54
S$472
  Top 0.254: 59.96,52.54 59.96,52.84 59.66,52.84
S$473
  Top 0.254: 59.36,51.44 59.66,51.14 59.96,51.14 59.96,51.24 | 57.86,49.24 57.86,51.44 | 57.86,49.24 60.66,46.64 | 57.86,49.24 57.86,48.94 57.86,46.24 | 59.96,51.24 59.96,51.34 | 59.66,51.34 59.66,51.04 59.96,51.04 59.96,51.24
  Top 0.305: 59.66,51.44 59.86,51.44 | 59.66,51.44 59.66,51.34 59.66,51.14 | 59.66,51.44 59.76,51.44 | 59.66,51.44 59.36,51.44 59.26,51.44 57.86,51.44 57.86,48.94
S$474
  Top 0.254: 60.66,52.84 60.76,52.84 60.76,52.64
S$475
  Top 0.254: 60.56,52.44 60.56,52.84 60.96,52.84 60.96,52.44 60.56,52.44
  Top 0.305: 60.56,52.44 60.76,52.44
S$476
  Top 0.254: 60.56,51.34 60.56,51.14
  Top 0.305: 60.56,51.34 60.76,51.34
S$477
  Top 0.254: 60.56,51.44 60.56,51.04 60.96,51.04 60.96,51.44 60.76,51.44 60.76,51.24
S$478
  Top 1.422: 118.2,73.56 118.1,73.56
S$479
  Top 1.422: 127.8,83.66 118.1,74.16 122.2,76.76 123,74.76
S$480
  Top 1.422: 123.7,79.26 123.8,79.26 123.8,73.96 122.8,73.96 122.8,78.06 122.2,78.06 122.2,74.16 121.1,74.16 121.1,75.26 120.2,75.26 120.2,74.16
S$481
  Top 1.27: 119.1,71.56 119.7,71.56 119.7,71.96
S$482
  Top 0.61: 147.3,49.96 147.2,49.96 147.2,43.66
S$483
  Top 0.61: 152.4,58.26 152.4,63.26 | 152.4,63.26 152.4,63.46 | 152.4,63.26 152.4,68.76
S$484
  Top 0.61: 152.1,61.96 152.1,57.96
S$485
  Top 0.61: 149.8,49.76 149.8,44.06
S$486
  Top 0.61: 152.3,49.76 152.3,43.76
S$487
  Top 0.61: 148.7,18.36 148.7,24.46
S$488
  Top 0.61: 148.7,15.56 153.9,15.56 153.9,15.66
S$489
  Top 0.61: 154.6,36.96 154.9,36.96 | 154.9,36.96 155.4,36.96 | 154.9,36.96 154.9,35.36
  Top 1.27: 154.6,36.96 154.8,36.96 154.8,42.26 154.1,42.26 154.1,36.86 153.6,36.86 153.6,40.56 152.8,40.56 152.8,37.16 151.9,37.16 151.9,39.36 151.4,39.36 151.4,37.16 150.4,37.16 150.4,37.86
S$490
  Top 0.61: 149.6,29.36 149.6,29.46
S$491
  Top 0.61: 147.6,30.66 150.1,30.66
  Top 1.27: 142.4,25.66 148.7,32.46 148.7,25.16 147.6,25.16 147.6,30.66
S$492
  Top 0.61: 149.8,31.76 149.8,31.96
S$493
  Top 0.61: 149.4,32.96 149.4,33.06
S$494
  Top 0.61: 149.4,34.26 149.4,34.36
S$495
  Top 0.61: 147.7,15.66 147.7,14.66 146,13.26
S$496
  Top 0.61: 146.7,15.46 146.7,13.86
S$497
  Top 0.61: 137.4,14.86 137.4,15.96 137.5,15.96 137.5,25.56 | 137.4,26.86 137.4,25.56 137.5,25.56 | 137.5,25.56 138.7,25.56 138.7,26.86
S$498
  Top 0.61: 137.5,16.26 142.1,20.86
S$499
  Top 0.61: 146.7,18.36 146.7,19.06
S$500
  Top 0.61: 146.7,19.16 144.9,20.86 142.1,20.86
S$501
  Top 0.61: 134.8,14.86 134.9,14.86 134.9,28.16
S$502
  Top 0.61: 140.9,64.86 143.8,64.86 | 143.8,64.86 145.4,64.86 149.8,60.36 | 140.8,63.86 143.8,63.86 143.8,64.86
S$503
  Top 0.61: 149.8,60.46 149.8,58.66
S$504
  Top 0.61: 140.8,62.86 144.6,62.86 147.2,60.06
S$505
  Top 0.61: 147.1,60.16 147.2,60.16 147.2,58.36
S$506
  Top 0.61: 132.3,14.86 132.3,16.26 134.9,18.86 134.9,17.56
S$507
  Top 0.61: 132.3,26.76 132.3,25.46 131,25.46 131,25.56 | 131,25.56 131,26.96 | 131,25.56 131,22.86 129.8,21.46
S$508
  Top 0.61: 138.2,64.86 135.8,64.86 133.6,66.46
S$509
  Top 0.61: 133.5,66.56 133.5,69.76
S$510
  Top 0.61: 136.2,26.76 136.1,26.76 136.1,25.36
S$511
  Top 0.61: 136.1,25.56 136.1,25.46 139.9,25.36 139.9,27.66
S$512
  Top 0.61: 122.7,42.16 123.1,42.16 123.1,40.76 | 122.7,42.16 121,42.16 121,42.06 | 123.1,40.76 123.1,40.96 | 123.1,40.76 123.1,39.56 | 122.7,42.16 122.7,39.56 122.3,39.56 | 122.3,39.56 121.8,39.56 | 122.3,39.56 122.3,41.96
S$513
  Top 0.61: 121,38.26 121,38.36
S$514
  Top 0.61: 121.3,36.96 121.3,37.06
S$515
  Top 0.61: 115.9,33.96 116.8,33.96 117.7,34.46
S$516
  Top 0.61: 122.1,18.16 122.1,16.26
S$517
  Top 0.61: 122.1,16.26 123.9,14.66
S$518
  Top 0.61: 127.3,14.66 123.9,14.66
S$519
  Top 0.61: 120.3,18.56 120.4,18.56 120.4,16.36 118.7,14.66 111.9,14.66 111.9,14.76
S$520
  Top 0.61: 114.1,21.16 112,21.16
S$521
  Top 0.61: 118.2,26.16 118.6,26.16 122,29.66 122.4,29.66 127.3,29.66
S$522
  Top 0.61: 120.1,21.26 118.3,21.26
S$523
  Top 0.61: 122.2,22.56 122.2,21.26 | 122.2,22.56 122.2,22.66 | 120.6,23.86 122.2,22.56
S$524
  Top 0.61: 121.2,21.16 121.2,22.96
S$525
  Top 0.61: 127.3,30.96 120.7,30.96 118.6,28.86
S$526
  Top 0.61: 118.2,28.76 118.9,28.76
S$527
  Top 0.61: 131.2,61.46 132.9,62.76 138,62.76 138,62.96
S$528
  Top 0.61: 126.2,61.26 128.7,61.26 128.7,62.66 | 126.2,61.26 123.6,61.26 123.6,62.66 123.5,62.66 | 126.2,61.26 126.2,63.76
S$529
  Top 0.61: 144.6,58.66 144.6,60.26 143.5,61.26
S$530
  Top 0.61: 137.4,25.46 136.2,25.46
S$531
  Top 0.61: 139.7,25.46 137.5,25.46 137.5,25.36 | 137.5,25.36 136.3,25.36 | 137.5,25.36 139.6,25.36
S$532
  Top 0.61: 138.7,44.76 138.7,46.06 142.2,48.76 142.2,60.06
S$533
  Top 0.61: 137.4,45.96 137.4,46.06 136.1,46.06 136.1,44.36 | 137.4,45.96 137.4,44.36 | 131,46.16 137.4,46.16 137.4,45.96
S$534
  Top 1.27: 147.5,35.86 155.6,44.06
S$535
  Top 1.27: 144.6,23.06 142.4,23.06 142.4,25.66 144.5,25.66 144.5,25.46 144.2,25.46 144.2,23.66 143.5,23.66 143.5,24.66
S$536
  Top 1.27: 155.4,59.86 145.7,69.56 145.7,69.46 145.9,69.46
S$537
  Top 1.27: 151.3,69.36 151.7,69.36 151.7,64.86 150.9,64.86 150.9,65.96 150.8,65.96 150.8,68.66 148.6,68.66 148.6,68.26 150,68.26 150,67.26 150.1,67.26 150.1,66.66 149.4,66.66 149.4,67.36
S$538
  Top 1.27: 148.5,69.36 148.4,69.36 148.4,67.26 148.1,67.26 148.1,68.76
S$539
  Top 1.27: 121.8,62.76 121.6,62.76
S$540
  Top 1.27: 146.3,26.56 143.7,26.56 143.7,26.36
S$541
  Top 1.27: 120.5,13.86 115.7,13.86 115.7,13.96 120.9,13.76 116.9,18.16
S$542
  Top 1.27: 117.8,15.56 118.8,15.56 118.8,13.96
S$543
  Top 0.61: 116.1,62.36 120.2,62.36 120.2,61.66
S$544
  Top 0.61: 119,29.16 118.2,28.76
S$545
  Top 0.61: 118.2,26.16 118.8,26.46
S$546
  Top 0.61: 118.4,23.46 120.9,23.46 120.9,23.36
S$547
  Top 0.61: 118.2,21.06 119.7,21.06
S$548
  Top 0.61: 112,20.86 114.1,20.86 114.1,21.36 112.3,21.36
S$549
  Top 0.61: 126.9,14.96 127.1,14.96 127.1,16.06
S$550
  Top 0.61: 128.5,61.66 124,61.66
S$551
  Top 0.61: 128.4,62.16 123.9,62.16
S$552
  Top 0.61: 123.9,62.26 120.3,62.26 120.3,62.16
S$553
  Top 0.61: 128.6,62.26 131.9,62.26 131.9,62.16
S$554
  Top 1.016: 146.6,23.46 149.6,20.06 151.9,19.56
S$555
  Top 1.016: 152.8,22.26 148.4,22.26 148.4,22.36
S$556
  Top 1.016: 126.1,84.86 126.1,86.86 127.4,86.86 124.8,83.36 | 124.8,83.36 124.8,80.66 | 124.8,83.36 118,76.56 118,77.66 124.8,77.66
S$557
  Top 1.016: 125.4,83.96 125.5,83.96 125.5,82.46 126.2,82.46 126.2,84.06
S$558
  Top 0.61: 131.2,83.86 131.2,84.56 132.4,84.56 132.4,83.66
S$559
  Top 0.61: 141.1,83.66 139.9,83.66 138.3,85.16
S$560
  Top 0.61: 138.3,85.26 133.7,85.26 133.7,83.66
S$561
  Top 0.61: 135,85.16 135,83.16
S$562
  Top 0.61: 141.2,82.26 139.3,82.26 | 139.3,82.26 139.1,82.26 137.5,83.76 137.5,82.66 139.3,82.26
S$563
  Top 0.61: 137.9,83.16 138,83.16 138,82.76
S$564
  Top 0.61: 137.5,83.86 137.5,84.06 136.2,84.06 136.2,83.76
S$565
  Top 0.61: 150.5,81.46 150.4,81.46 150.4,83.66 148.5,83.66 148.5,83.56
S$566
  Top 0.61: 152.2,81.46 153.8,81.46
S$567
  Top 0.61: 150.5,78.36 148.3,78.36 148.3,78.46 150.2,78.46
S$568
  Top 0.61: 148.3,77.26 151.4,77.26 151.4,78.66
S$569
  Top 0.61: 148.3,75.86 151.7,75.86 152.4,76.56 152.4,78.46
S$570
  Top 0.61: 141.1,81.06 140.1,81.06 138.8,79.76 138.8,76.76
S$571
  Top 0.61: 138.8,76.56 137.6,76.06 137.6,76.56
S$572
  Top 0.61: 140.7,79.76 140.7,77.16
S$573
  Top 0.61: 140.4,79.76 140.4,77.16
S$574
  Top 0.61: 140.9,75.96 140.2,75.96 137.6,73.96 136.2,73.96 | 136.2,73.96 132.5,73.96 132.5,76.36 | 136.3,76.06 136.2,76.06 136.2,73.96
S$575
  Top 0.61: 133.7,76.16 133.7,74.26
S$576
  Top 0.61: 135,76.06 135,74.06
S$577
  Top 1.016: 150.4,71.76 152.9,74.36 154.9,76.46
S$578
  Top 1.016: 153.6,72.26 153.6,74.16 153.1,74.16 153.1,72.26 152.5,72.26 152.5,72.86
S$579
  Top 1.016: 154.2,78.06 154.2,82.46 148.3,88.46
S$580
  Top 1.016: 151.8,86.56 151.8,85.46
S$581
  Top 1.016: 131.7,85.36 131.6,85.36 133.1,86.46 135.1,86.86
S$582
  Top 1.016: 129.9,74.36 130,74.36 130,71.26 128.8,71.26 128.8,73.86 135.2,71.26
S$583
  Top 0.61: 129.7,14.76 129.8,14.76 129.8,21.36
S$584
  Top 0.61: 133.6,25.46 133.6,27.06 | 133.6,25.46 132.3,25.56 | 132.4,25.46 133.6,25.46
S$585
  Top 0.61: 129.8,25.16 129.8,26.76 | 129.8,25.16 129.8,24.66 | 129.8,24.06 129.8,25.16
S$586
  Top 0.61: 127.2,21.36 129.8,23.96
S$587
  Top 0.61: 146,13.26 143.4,13.26 141.7,14.96
S$588
  Top 0.61: 141.7,15.06 139.9,15.06 139.9,14.56 141.5,14.56 141.5,14.66 141.8,14.66 141.8,14.46 142,14.46
S$589
  Top 0.61: 126.7,86.46 126.9,86.46 126.9,83.26 124.6,83.26 124.6,80.76 124.2,80.76 124.2,81.86 123.9,81.86 123.9,80.66 123.5,80.66 123.5,81.16 123.2,81.16 123.2,79.76 122.8,79.76 122.8,80.56 122.4,80.56 122.4,78.76 122.1,78.76 | 121.2,78.76 122.1,78.76 | 122.1,78.76 122.1,79.56 121.6,79.56 121.6,79.06
S$590
  Top 0.254: 121.2,79.26 121.3,79.26 121.3,78.86
S$591
  Top 0.254: 122.1,80.06 122.1,79.76
S$592
  Top 0.254: 111.9,48.06 111.9,47.46 111.7,47.46 111.7,46.66 | 111.1,48.86 111.1,46.66 111.3,46.66 111.3,48.66 111.5,48.56 111.5,46.66 111.7,46.66 | 111.7,46.66 111.7,48.26 111.8,48.06 111.9,46.86 113.2,46.86 | 113.3,46.86 113.2,46.86 | 113.2,46.86 112.1,46.96 112.1,47.96 112.3,47.86 112.3,47.06 112.5,47.06 | 113.1,47.06 112.6,47.06 | 112.6,47.06 112.5,47.06 | 112.5,47.06 112.5,47.56 | 112.6,47.46 112.6,47.06 | 112.6,47.06 112.9,47.06 112.9,47.26 112.7,47.26 112.7,47.36 | 111.7,46.66 113.4,46.66
S$593
  Top 0.254: 111.1,57.16 111,57.16 111,54.66 111.2,54.86 111.2,57.06 113.2,57.06 | 113.4,57.06 113.2,57.06 | 113.2,57.06 113.2,56.86 111.4,56.86 111.4,55.06 111.6,55.26 111.6,56.66 112.8,56.66 | 113,56.66 112.8,56.66 | 112.8,56.66 112.8,56.46 111.8,56.46 111.8,55.46 112,55.86 112,56.26 112.2,56.26 | 112.6,56.26 112.2,56.26 | 112.2,56.26 112.2,55.86 112.4,56.36
S$594
  Top 0.61: 140,44.66 140,47.16
S$595
  Top 0.61: 143.4,61.36 142.2,61.36 142.2,60.16
S$596
  Top 0.61: 141.3,45.06 141.3,46.36 142.6,46.36 142.6,44.86
S$597
  Top 0.61: 144.7,49.46 144.7,47.76 142.6,45.96
S$598
  Top 0.61: 129.8,44.76 129.9,44.76 129.9,48.76 | 129.9,48.76 129.9,52.96 129.6,52.96 129.6,45.26 | 129.9,48.76 130.5,49.56
S$599
  Top 0.61: 127.1,16.16 127.1,21.26
S$600
  Top 0.61: 140.8,58.96 140.8,58.86 139.2,57.46 | 140.8,58.96 140.8,62.96 | 140.8,58.96 140.8,56.16 139.2,54.86
S$601
  Top 0.61: 127.7,36.06 125.3,36.06 125.3,31.06
S$602
  Top 0.61: 125.5,32.26 127.4,32.26
S$603
  Top 0.61: 125.6,33.56 127.3,33.56
S$604
  Top 0.61: 125.4,34.76 127.4,34.76
S$605
  Top 0.61: 146.2,42.36 145.1,42.36 | 146.2,42.36 146.3,42.36 | 146.2,42.36 147.2,43.46
S$606
  Top 0.61: 144.7,41.16 147,41.16 149.8,43.96
S$607
  Top 0.61: 144.5,39.86 148.5,39.86 152.3,43.76
S$608
  Top 0.61: 120.5,23.86 118.3,23.86 118.3,23.76
S$609
  Top 0.61: 143.9,38.56 147,38.56
S$610
  Top 0.61: 147.1,38.56 149.2,40.56
S$611
  Top 1.016: 119.3,33.56 120.5,33.56 120.5,33.76 124.2,37.66
S$612
  Top 1.016: 120.1,34.76 120.5,34.76
S$613
  Top 1.016: 121,36.76 122.4,36.76
S$614
  Top 1.016: 120.2,13.76 122.7,13.76 122.7,13.56 122.8,13.56 122.8,12.46
S$615
  Top 1.016: 149.7,11.96 148.1,11.96 149,13.36 149,12.56 151.1,12.46
S$616
  Top 1.016: 147.8,22.76 140.7,22.76 142.7,25.86 142.7,23.86 143.3,23.76
S$617
  Top 0.61: 139.2,48.76 139.2,50.06 | 134.9,45.86 134.9,44.66 | 134.9,45.86 134.9,46.06 133.4,46.06 133.4,46.16 | 133.6,44.66 133.6,46.16 133.4,46.16 | 132.3,46.16 133.4,46.16 | 132.3,46.16 131.1,46.16 131.1,44.16 | 132.3,46.16 132.3,44.36 | 139.2,48.76 139.2,48.66 | 134.9,45.86 139.2,48.76
S$618
  Top 0.61: 139.2,52.46 142.2,55.06
S$619
  Top 0.61: 130,51.86 130.5,52.76 130.2,52.06
S$620
  Top 0.61: 129.6,53.06 130.5,53.06 130.5,52.96
S$621
  Top 0.61: 141.9,46.46 143,46.46
S$622
  Top 0.61: 113.8,31.86 115.8,33.86
S$623
  Top 0.61: 115.5,18.36 113.9,20.56
S$624
  Top 0.61: 114.7,18.16 114.8,18.16 114.8,19.16
S$625
  Top 0.305: 130.7,55.26 130.6,55.26 130.6,58.06 130.4,58.06 | 130.4,58.06 130.4,55.26 130.1,55.26 130.1,58.06 130.4,58.06
S$626
  Top 0.254: 110.9,57.36 110.9,55.16 110.9,54.36 | 110.9,54.36 113.7,57.36 | 110.9,52.36 110.9,54.36 | 111.3,52.36 111,52.76
  Top 0.305: 112.9,52.36 112.2,52.36 111.3,52.36 110.9,52.36 110.9,55.16
S$627
  Top 0.254: 111.3,51.26 110.9,50.96
S$628
  Top 0.254: 111.1,54.46 111.1,52.66
S$629
  Top 0.254: 111.1,51.06 111.1,48.96
S$630
  Top 0.254: 112.3,52.36 112.7,52.66 | 112.7,52.56 113,52.56
  Top 0.305: 112.7,52.66 112.7,52.56 112.7,52.46
S$631
  Top 0.254: 113,52.46 113,52.76 112.7,52.76
S$632
  Top 0.254: 112.4,51.36 112.7,51.06 113,51.06 113,51.16 | 110.9,49.16 110.9,51.36 | 110.9,49.16 113.7,46.56 | 110.9,49.16 110.9,48.86 110.9,46.16 | 113,51.16 113,51.26 | 112.7,51.26 112.7,50.96 113,50.96 113,51.16
  Top 0.305: 112.7,51.36 112.9,51.36 | 112.7,51.36 112.7,51.26 112.7,51.06 | 112.7,51.36 112.8,51.36 | 112.7,51.36 112.4,51.36 112.3,51.36 110.9,51.36 110.9,48.86
S$633
  Top 0.254: 113.7,52.76 113.8,52.76 113.8,52.56
S$634
  Top 0.254: 113.6,52.36 113.6,52.76 114,52.76 114,52.36 113.6,52.36
  Top 0.305: 113.6,52.36 113.8,52.36
S$635
  Top 0.254: 113.6,51.26 113.6,51.06
  Top 0.305: 113.6,51.26 113.8,51.26
S$636
  Top 0.254: 113.6,51.36 113.6,50.96 114,50.96 114,51.36 113.8,51.36 113.8,51.16
(copper drawn outside any net)
  shapes: Top area x252

## Text on the board
tPlace: UCODE G2iM+ | V0 | UCODE G2iM+ | V0 | UCODE G2iM+ | V0 | Large | Large | Large | KEEP OUT AREA | KEEP OUT AREA | KEEP OUT AREA
bPlace: KEEP OUT AREA | KEEP OUT AREA | KEEP OUT AREA